# Altium PCB Panelized_S3220A.PcbDoc
Units mm, origin at the board's own origin, x right, y up, seen from the top; angles counter-clockwise.
Board outline 366 x 264 mm, 4 copper layers (Top Layer, Internal 1, Internal 2, Bottom Layer), stack 1.411 mm thick; 3 components, 135 nets, 10 pads, 0 vias.
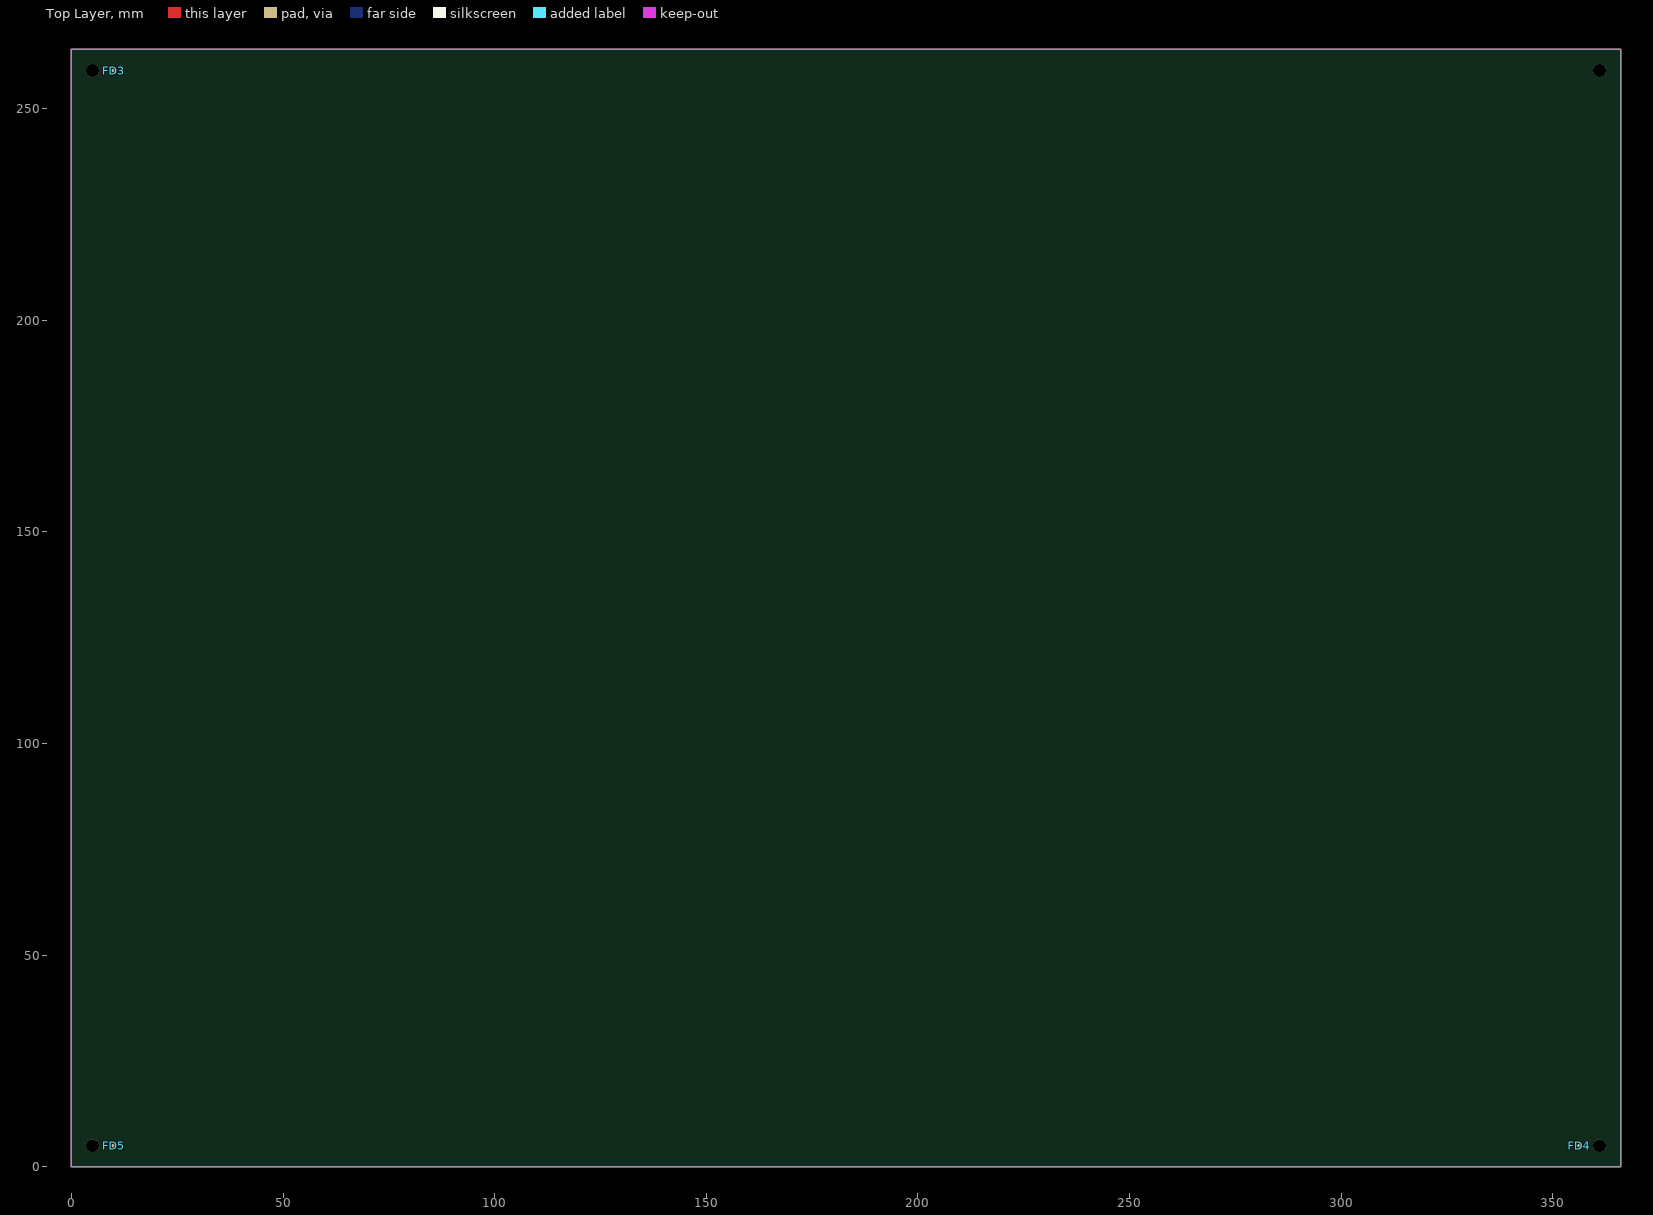
[diagram p0: Top Layer view]
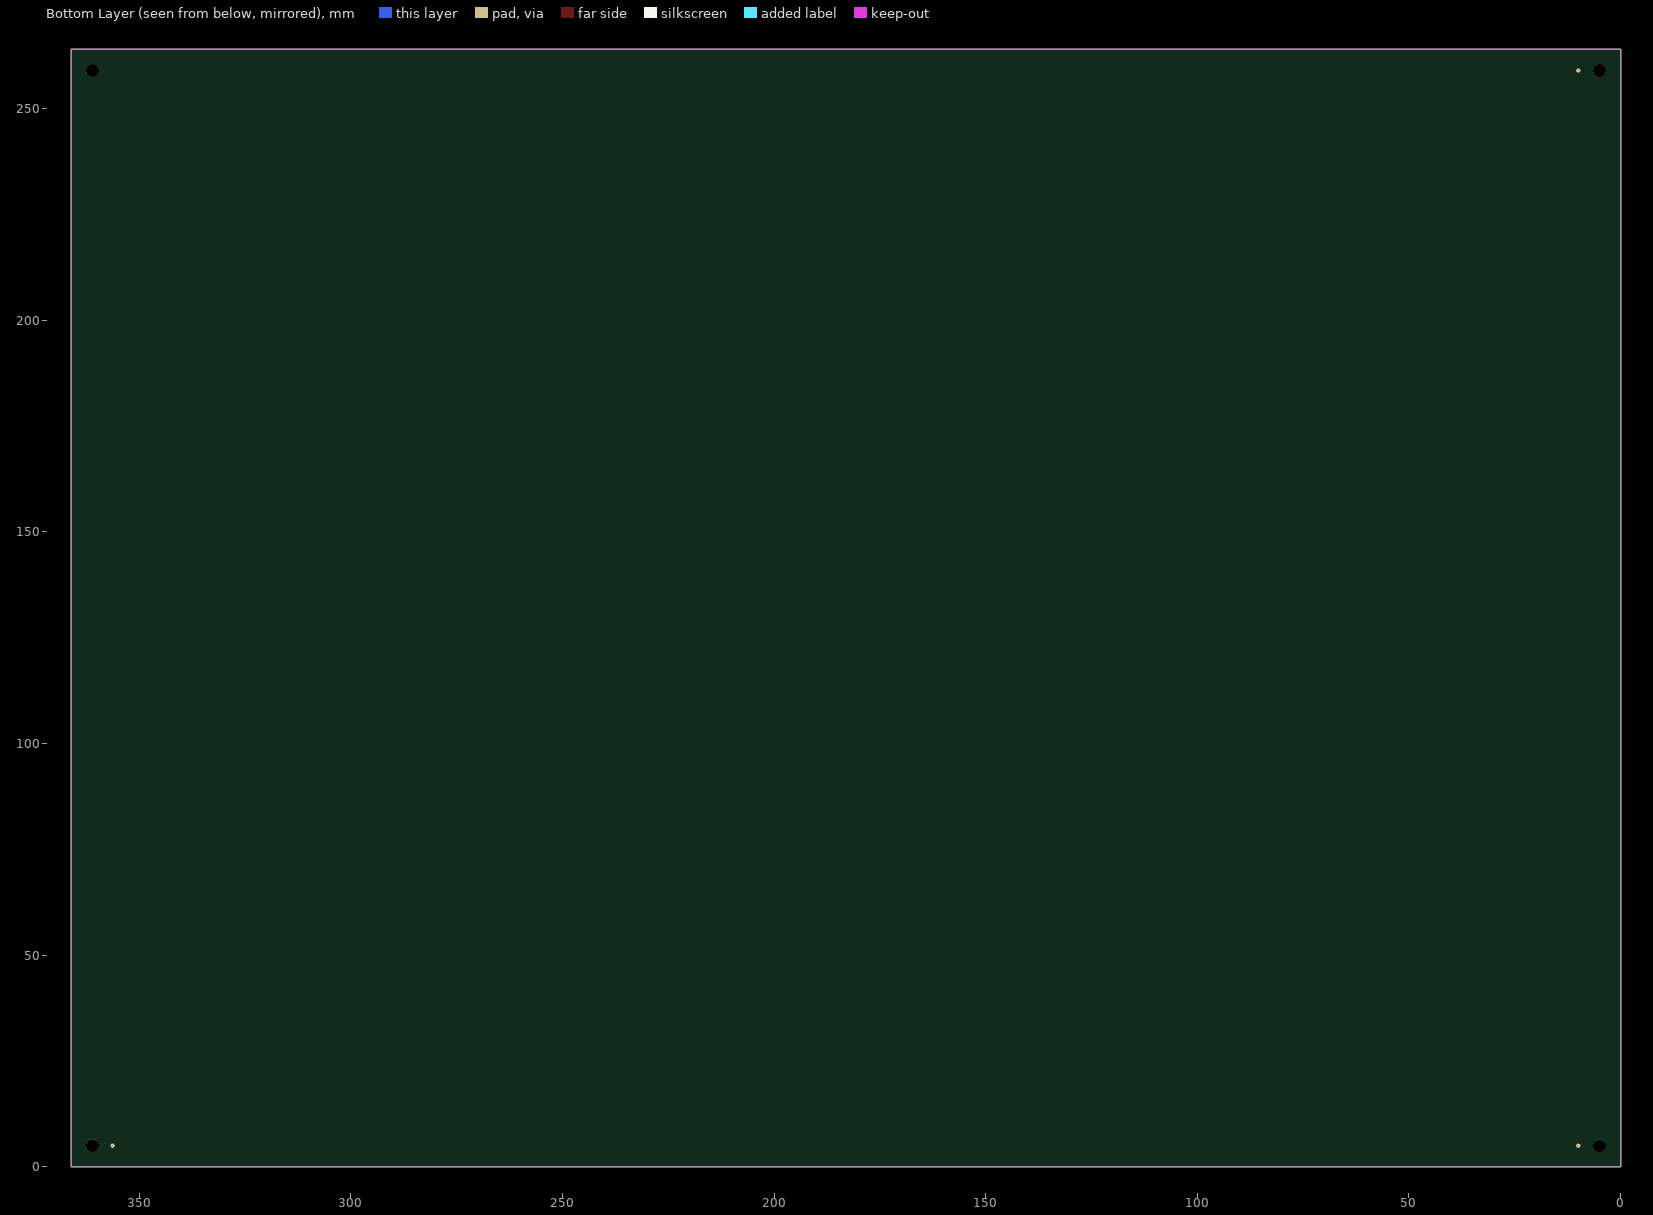
[diagram p1: Bottom Layer view, seen from below]

## Layer stack, top to bottom
Top Solder: solder mask 0.0102, Solder Resist, Dk 3.5
Top Layer: signal copper 0.035
Dielectric 1: core 0.12, FR-4, Dk 4.2
Internal 1: signal copper 0.035
Dielectric 3: prepreg 1.03, Dk 4.2
Internal 2: signal copper 0.035
Dielectric 2: core 0.12, Dk 4.2
Bottom Layer: signal copper 0.0356
Bottom Solder: solder mask 0.0102, Solder Resist, Dk 3.5

## Board outline
0,0 0,264 366,264 366,0

## Design rules (kind name [scope] priority, off if disabled: settings)
AssemblyTestPointUsage [All] p1 off:
AssemblyTestpoint [All] p1 off: testpointundercomponent=TRUE minsize=1.016 maxsize=2.54 preferedsize=1.524 minholesize=0 maxholesize=1.016 preferedholesize=0.813 testpointgrid=0.025 usegrid=TRUE gridtolerance=0 allowsidetop=TRUE allowsidebottom=TRUE
Clearance Clearance_TMP103 [HasFootprint('BGA4C40P2X2_76X76X62')] p1: gap=0.102 ignorepadtopadclearanceinfootprint=FALSE except(0: Arc-Hole Track-Hole SMDPad-Hole THPad-Hole Via-Hole Fill-Hole Poly-Hole Region-Hole Text-Hole)
Clearance Clearance_Poly [InPoly] p2: gap=0.25 ignorepadtopadclearanceinfootprint=FALSE except(0: Arc-Hole Track-Hole SMDPad-Hole THPad-Hole Via-Hole Fill-Hole Poly-Hole Region-Hole Text-Hole)
Clearance [All] p3: gap=0.15 ignorepadtopadclearanceinfootprint=FALSE except(0: Arc-Hole Track-Hole SMDPad-Hole THPad-Hole Via-Hole Fill-Hole Poly-Hole Region-Hole Text-Hole)
Clearance Clearance_Keepout [isKeepout] p4: gap=0.3 ignorepadtopadclearanceinfootprint=FALSE except(0: Arc-Hole Track-Hole SMDPad-Hole THPad-Hole Via-Hole Fill-Hole Poly-Hole Region-Hole Text-Hole)
ComponentClearance ComponentClearance_Fiducial [hasfootprint('fiducial_rect') or hasfootprint('fiducial_round')] p1 off: gap=0 collisioncheckmode=3 verticalgap=0 showdistances=FALSE
ComponentClearance [All] p2 off: gap=0.254 collisioncheckmode=3 verticalgap=0.254 showdistances=FALSE
DiffPairsRouting [All] p1: maxlimit=0.25 minlimit=0.25 mostfreqgap=0.25 toplayer_minwidth=0.2 toplayer_maxwidth=0.3 toplayer_prefwidth=0.2 midlayer1_minwidth=0.2 midlayer1_maxwidth=0.3 midlayer1_prefwidth=0.2 midlayer2_minwidth=0.2 midlayer2_maxwidth=0.3 midlayer2_prefwidth=0.2 bottomlayer_minwidth=0.2 bottomlayer_maxwidth=0.3 bottomlayer_prefwidth=0.2 maxuncoupledlength=12.7
FabricationTestPointUsage [All] p1 off: valid=0 allowmultiple=FALSE
FabricationTestpoint [All] p1 off: side=3 testpointundercomponent=TRUE minsize=1.016 maxsize=2.54 preferedsize=1.524 minholesize=0 maxholesize=1.016 preferedholesize=0.813 testpointgrid=0.025 allowsidetop=TRUE allowsidebottom=TRUE usegrid=TRUE gridtolerance=0
FanoutControl Fanout_BGA [IsBGA] p1: bgadir=Out bgaviamode=Centered fanoutstyle=BGA fanoutdirection=Alternating viagrid=0.025 // Fanout_BGA (Default Rule)
HoleSize [All] p1: absolutevalues=TRUE maxlimit=5.08 minlimit=0.203 maxpercent=80.000 minpercent=20.000
MatchedLengths "USB length matching" [InNetClass('All Nets')] p1: tolerance=2 checknetsindiffpair=TRUE checkdiffpairvsdiffpair=FALSE checkxsignals=FALSE checkothers=FALSE
MinimumSolderMaskSliver [All] p1: minsoldermaskwidth=0
PlaneClearance [All] p1: clearance=0.305
PlaneConnect PlaneConnect_Via [isvia] p1: planeconnectstyle=Direct reliefexpansion=0.508 reliefentries=4 reliefconductorwidth=0.254 reliefairgap=0.254
PlaneConnect [All] p2: planeconnectstyle=Relief reliefexpansion=0.254 reliefentries=4 reliefconductorwidth=0.508 reliefairgap=0.254
PolygonConnect PolygonConnect_SR [(ObjectKind = 'Component') And (Footprint = 'BGA81C80P3X3_290X230X110')] p1: connectstyle=Relief reliefconductorwidth=0.2 reliefentries=4 polygonreliefangle="90 Angle" airgapwidth=0.254
PolygonConnect PolygonConnect_TMP103 [HasFootprint('BGA4C40P2X2_76X76X62')] p2: connectstyle=Relief reliefconductorwidth=0.152 reliefentries=4 polygonreliefangle="90 Angle" airgapwidth=0.305
PolygonConnect PolygonConnect_Via [IsVia] p3: connectstyle=Direct reliefconductorwidth=0.254 reliefentries=4 polygonreliefangle="90 Angle" airgapwidth=0.254
PolygonConnect [All] p4: connectstyle=Relief reliefconductorwidth=0.2 reliefentries=4 polygonreliefangle="90 Angle" airgapwidth=0.305
RoutingLayers [All] p1: top layer_v5=TRUE mid layer 1_v5=FALSE mid layer 2_v5=FALSE bottom layer_v5=TRUE
RoutingVias [All] p1: holewidth=0.35 width=0.5 viastyle="Through Hole" minholewidth=0.25 minwidth=0.5 maxholewidth=0.5 maxwidth=1
SMDNeckDown [All] p1 off: percent=50.000
ShortCircuit ShortCircuit_Logo [hasfootprint('GT Logo Inv') or istextinverted] p1: allowed=TRUE
ShortCircuit [All] p2: allowed=FALSE
SilkToSilkClearance [All] p1 off: silktosilkclearance=0.254
SilkToSolderMaskClearance SilkscreenOverComponentPads [IsPad] p1 off: minsilkscreentomaskgap=0.254 clearancetoexposedcopper=TRUE
SolderMaskExpansion [All] p1 off: expansion=0.102 istentingtop=FALSE
Width Width_CASE [InNet('CASE')] p1: maxlimit=2.54 minlimit=0.203 preferedwidth=0.508
Width [All] p2: maxlimit=2.5 minlimit=0.15 preferedwidth=0.2
15 further rules are at their usual default settings.

## Classes and differential pairs
differential pair USB_Data: +USB_Data_P -USB_Data_N

## Components (designator, comment, footprint, x,y, rotation, side; value= is the part's Value field where it differs from the comment)
FD3 "Fiducial" FD_Fiducial 10,259 r90 top
FD4 "Fiducial" FD_Fiducial 356.25,5 r90 top (schematic designator FD3)
FD5 "Fiducial" FD_Fiducial 10,5 r90 top (schematic designator FD3)

## Footprints (in the part's own frame and the unit in brackets; to place one, negate y for a bottom-side part, rotate by r counter-clockwise, add the part's x,y. Pads: shape width x height; smd on the part's side, far side on the other; paste and mask are expansions set on the pad)
FD_Fiducial [mm] "Fiducial - reference point"
  round 1 smd paste-10 mask+0.5: 0(0,0)
  round 1 smd far side paste-10 mask+0.5: 0(0,0)
  Top Layer pour cut-out: 0,-1 -0.383,-0.924 -0.707,-0.707 -0.924,-0.383 -1,0 -1,0 -0.924,0.383 -0.707,0.707 -0.383,0.924 0,1 0,1 0.383,0.924 0.707,0.707 0.924,0.383 1,0 1,0 0.924,-0.383 0.707,-0.707 0.383,-0.924 0,-1
  Bottom Layer pour cut-out: 0,-1 -0.383,-0.924 -0.707,-0.707 -0.924,-0.383 -1,0 -1,0 -0.924,0.383 -0.707,0.707 -0.383,0.924 0,1 0,1 0.383,0.924 0.707,0.707 0.924,0.383 1,0 1,0 0.924,-0.383 0.707,-0.707 0.383,-0.924 0,-1

## Part data
FD3 FD4 FD5: "Reference point for assembly machine", Manufacturer="Swiss Innovation Lab", Currency=$, Manufacturer Part Number=Fiducial, Price=0, Supplier 1="Swiss Innovation Lab", Supplier Part Number 1=Fiducial

## Free pads (board coordinates)
  round 3 hole 3 unplated: ""(5,5) ""(5,259) ""(361,5) ""(361,259)

## Nets (pads, with @x,y where several pads share a name; then routed paths per layer and width w, separated by ;. In a path a pad name is that pad's centre, name@x,y a point inside that pad or via, vN(x,y) a via of type N, cw(c..) or ccw(c..) an arc to the next point about the centre after c; other vN are vias at no path point)
+3V: 
+3V_ext: 
+4V7: 
+5V: 
+VBat: 
ACC_INT: 
eLED_on_off: 
eLED_on_off_ext: 
ePaper_On_Off: 
ePaper_PSU: 
ePaper_RST: 
ePaper_VDD: 
ePaper_Wake_up: 
GND: 
GND_ext: 
GPS_On_Off: 
I2C_EXP_INT: 
LED_1: 
LED_1_switched: 
LED_2: 
LED_2_switched: 
LED_3: 
LED_3_switched: 
LED_4: 
LED_4_switched: 
LED_ACOK: 
LED_ACOK_ext: 
LED_CHGOK: 
LED_CHGOK_ext: 
Lora_On_Off: 
LORA_RESET: 
LoRa_VDD: 
Mic_ext: 
Mic_On_Off: 
Mic_On_Off_ext: 
Microphone: 
NetC5_1: 
NetC6_1: 
NetC6_2: 
NetC8_2: 
NetC11_1: 
NetC11_2: 
NetC12_2: 
NetC15_1: 
NetC17_2: 
NetC24_2: 
NetC28_2: 
NetC32_1: 
NetC33_1: 
NetC39_1: 
NetC40_1: 
NetC41_2: 
NetC42_2: 
NetC43_2: 
NetC44_1: 
NetC44_2: 
NetC45_2: 
NetD9_2: 
NetF2_1: 
NetJ10_1: 
NetJ10_2: 
NetJ10_3: 
NetJ14_1: 
NetL3_2: 
NetP7_S: 
NetQ2_3: 
NetQ3_3: 
NetQ5_3: 
NetQ6_3: 
NetQ10_3: 
NetR1_2: 
NetR2_2: 
NetR3_2: 
NetR6_2: 
NetR8_1: 
NetR9_1: 
NetR10_1: 
NetR10_2: 
NetR14_2: 
NetR15_1: 
NetR16_1: 
NetR18_1: 
NetR19_1: 
NetR19_2: 
NetR21_2: 
NetR38_2: 
NetR49_1: 
NetR49_2: 
NetU5_1: 
NetU7_13: 
NetU8_16: 
NetU19_1: 
NetU19_2: 
NetU19_3: 
NTC: 
PB_1: 
PB_1_ext: 
PB_2: 
PB_2_ext: 
PB_3: 
PB_3_ext: 
PB_4: 
PB_4_ext: 
RESET#: 
RX_ePaper: 
S\D\: 
SCL: 
SCL_ext: 
SDA: 
SDA_ext: 
SWDCLK: 
SWDIO: 
SWO: 
TX_ePaper: 
UART_CTS: 
UART_RTS: 
UART_RX_ePaper: 
UART_RX_GPS: 
UART_RX_Lora: 
UART_RX_USB: 
UART_RX_WiFi: 
UART_TX_ePaper: 
UART_TX_GPS: 
UART_TX_Lora: 
UART_TX_USB: 
UART_TX_WiFi: 
USB_Data_N: 
USB_Data_P: 
VBat: 
Vcc: 
Vcc_ext: 
Vext: 
VSys: 
Vusb: 
WiFi_ON_OFF: 
pads on no net: FD3.0 FD4.0 FD5.0

## Keep-outs
Keep-Out Layer:
  the board outline again, w0.3

## Silkscreen, mask and mechanical layers (free items; w line width, h text height)
Fabrication notes:
  drawing of 702 lines, arcs and shapes, not listed
  text "DESIGN INFORMATION" at 396.102,259.543 h2
  text "BOARD NAME:" at 433.694,259.543 h2
  text "Panelized S3220A" at 446.5,259.5 h2
  text "BOARD TECHNOLOGY" at 396.102,257.003 h2
  text "0.2mm" at 398.223,254.814 h2
  text "PANEL SIZE:" at 448.5,254.75 h2
  text "366.00 mm" at 463,254.75 h2
  text "264.00 mm" at 486,254.75 h2
  text "0.2mm" at 411.901,254.641 h2
  text "0.2mm" at 425.871,254.514 h2
  text "X" at 478.781,253.955 h2
  text "(MIN. TRACK   /      PADS          /    CLEARANCE)" at 396,251.75 h2
  text "SINGLE BOARD SIZE:" at 441,250.75 h2
  text "166.00 mm" at 463,250.75 h2
  text "115.00 mm" at 486,250.75 h2
  text "X" at 478.781,250.205 h2
  text "MINIMUM HOLE SIZE: 0.35mm" at 396.25,248.5 h2
  text "CIRCUIT TYPE:" at 396.102,244.481 h2
  text "SS" at 418.962,244.481 h2
  text "DS" at 436.742,244.481 h2
  text "X" at 451.347,244.481 h2
  text "PTH" at 454.522,244.481 h2
  text "ML" at 465.444,244.481 h2
  text "X" at 469.254,244.481 h2
  text "No. of Layers" at 472.302,244.481 h2
  text "4" at 489.663,244.324 h2
  text "FINGER CONNECTOR DIM PER:" at 396.102,241.433 h2
  text "AS SHOWN" at 472.302,241.433 h2
  text "No. OFF TOTAL" at 412.866,238.639 h2
  text "ONE SIDE" at 454.522,238.639 h2
  text "BOTH SIDES" at 472.302,238.385 h2
  text "X" at 433.664,235.818 h2
  text "VIAS:" at 396.102,235.718 h2
  text "NONE" at 407.532,235.718 h2
  text "X" at 415.914,235.718 h2
  text "FEED THRU'" at 418.962,235.718 h2
  text "TENTED" at 436.742,235.718 h2
  text "BURIED LAYER SEQUENCE" at 454.522,235.718 h2
  text "UNIQUE DRILL" at 418.962,232.67 h2
  text "2 SIZE" at 436.742,232.67 h2
  text "BLIND LAYER SEQUENCE" at 454.522,232.67 h2
  text "Layer Stack Manager (PCB)" at 431.535,230.384 h2
  text "X" at 469.254,230.384 h2
  text "AS SHOWN" at 472.302,230.384 h2
  text "LAYER CONSTRUCTION PER:" at 396.102,230.257 h2
  text "Altium Designer 20" at 472.141,227.597 h2
  text "ARTWORK:" at 396.102,227.463 h2
  text "MANUAL" at 418.962,227.463 h2
  text "DIGITISED" at 436.742,227.463 h2
  text "X" at 451.474,227.463 h2
  text "CAD" at 454.522,227.463 h2
  text "TYPE" at 465.444,227.463 h2
  text "ARTWORK/PATTERN MASTER LIST" at 396.102,222.764 h2
  text "DESCRIPTION" at 397.372,220.351 h2
  text "DRAWING No./CAD FILE REF." at 416.041,220.351 h2
  text "LAYER NAME" at 457.316,220.351 h2
  text "GERBER FILE REF" at 478.068,220.275 h2
  text "Top Paste Mask" at 455.259,215.271 h2
  text "GTP" at 448.182,215.221 h2
  text "GTP" at 498.062,215.195 h2
  text "GERBER FILE" at 395.757,215.144 h2
  text "GTO" at 448.182,212.721 h2
  text "GTO" at 498.062,212.706 h2
  text "Top Overlay" at 455.259,212.68 h2
  text "GERBER FILE" at 395.757,212.604 h2
  text "Top Solder Mask" at 455.259,210.242 h2
  text "GTS" at 448.182,210.221 h2
  text "GTS" at 498.062,210.115 h2
  text "GERBER FILE" at 395.757,210.064 h2
  text "TOP LAYER" at 455.259,207.651 h2
  text "GTL" at 498.062,207.575 h2
  text "GERBER FILE" at 395.757,207.524 h2
  text "GTL" at 448.182,207.521 h2
  text "G1" at 498.062,205.192 h2
  text "Signal Layer 1" at 455.259,205.092 h2
  text "GERBER FILE" at 395.757,204.984 h2
  text "G1" at 448.182,205.001 h2
  text "Signal Layer 2" at 455.26,202.592 h2
  text "G2" at 498.062,202.592 h2
  text "G2" at 448.182,202.501 h2
  text "GERBER FILE" at 395.757,202.444 h2
  text "BOTTOM LAYER" at 455.259,200.031 h2
  text "GBL" at 448.182,199.957 h2
  text "GBL" at 498.062,199.955 h2
  text "GERBER FILE" at 395.757,199.904 h2
  text "GBS" at 448.182,197.557 h2
  text "Bottom Solder Mask" at 455.259,197.542 h2
  text "GBS" at 498.062,197.415 h2
  text "GERBER FILE" at 395.757,197.364 h2
  text "GBO" at 448.182,194.957 h2
  text "Bottom Overlay" at 455.259,194.951 h2
  text "GBO" at 498.062,194.875 h2
  text "GERBER FILE" at 395.757,194.824 h2
  text "GBP" at 498.062,192.462 h2
  text "Bottom Paste Mask" at 455.259,192.411 h2
  text "GBP" at 448.182,192.361 h2
  text "GERBER FILE" at 395.757,192.284 h2
  text "GM3" at 498.062,187.362 h2
  text "V-groove scoring" at 455.259,187.311 h2
  text "GM3" at 448.182,187.261 h2
  text "GERBER FILE" at 395.757,187.184 h2
  text "GM4" at 498.062,184.862 h2
  text "Route Cutter Tool Layer" at 455.259,184.811 h2
  text "GM4" at 448.182,184.761 h2
  text "GERBER FILE" at 395.757,184.684 h2
  text "APERTURE LIST" at 395.757,172.097 h2
  text "APR" at 448.182,172.021 h2
  text "DRILL REPORT" at 395.757,169.557 h2
  text "DRR" at 448.182,169.481 h2
  text "DRILL FILE" at 395.757,166.95 h2
  text "DRL" at 448.182,166.806 h2
  text "TXT" at 448.182,164.4 h2
  text "EXCELLON DRILL" at 395.757,164.325 h2
  text "MATERIAL:" at 396.102,159.12 h2
  text "GLASS FIBRE EPOXY RESIN NEMA GRADE FR4-08 (IPC-4101) - WITH TG170" at 421.756,158.866 h2
  text "X" at 419.089,158.739 h2
  text "THICKNESS:" at 403.976,155.945 h2
  text "0.8mm" at 421.756,155.945 h2
  text "1.2mm" at 439.409,155.945 h2
  text "1.6mm" at 457.062,155.945 h2
  text "2.4mm" at 474.842,155.945 h2
  text "3.2mm" at 492.622,155.945 h2
  text "X" at 454.649,155.818 h2
  text "TOLERANCE:" at 403.849,152.897 h2
  text "OTHER +/-" at 474.842,152.897 h2
  text "IN A/W IPC-D-300G CLASS" at 422.302,152.697 h2
  text "BOW & TWIST:" at 403.836,149.849 h2
  text "AS SHOWN" at 474.969,149.722 h2
  text "IN A/W IPC-D-300G CLASS" at 422.302,149.649 h2
  text "COPPER THICKNESS (FINISHED)" at 401.4,146.85 h2
  text "18um" at 421.756,144.261 h2
  text "35um" at 448.807,144.261 h2
  text "70um" at 475.096,144.261 h2
  text "OUTER:" at 405,144.15 h2
  text "X" at 446.064,144.058 h2
  text "18um" at 421.756,141.213 h2
  text "35um" at 448.807,141.213 h2
  text "70um" at 475.096,141.213 h2
  text "INNER SIGNAL:" at 405,141.15 h2
  text "X" at 446.013,141.01 h2
  text "18um" at 421.756,138.165 h2
  text "35um" at 448.807,138.165 h2
  text "70um" at 475.096,138.165 h2
  text "INNER PWR:" at 405,138.15 h2
  text "X" at 446.14,138.038 h2
  text "STRUCTURE:" at 396.102,135.117 h2
  text "REFER" at 421.756,135.117 h2
  text "AS PER DRAWING No." at 421.629,131.942 h2
  text "AS SHOWN" at 474.969,131.942 h2
  text "X" at 472.429,131.815 h2
  text "DRILLING:" at 396.102,129.148 h2
  text "COMPONENT SIDE" at 421.756,126.862 h2
  text "SOLDER SIDE" at 448.553,126.862 h2
  text "VIEWED FROM:" at 403.1,126.65 h2
  text "X" at 419.089,126.608 h2
  text "REFERENCE:" at 403.341,123.814 h2
  text "AS SHOWN" at 421.629,123.687 h2
  text "PATTERN MASTER LIST" at 448.68,123.687 h2
  text "X" at 472.429,123.687 h2
  text "NC_DRILL FILES" at 474.969,123.687 h2
  text "X" at 419.089,123.56 h2
  text "20um" at 448.807,120.766 h2
  text "PTH MINIMUM COPPER THICKNESS:" at 403.4,120.65 h2
  text "X" at 446.14,120.639 h2
  text "OTHER" at 474.969,120.639 h2
  text "NPTH:" at 403.3,117.75 h2
  text "TENTED" at 421.629,117.591 h2
  text "X" at 446.14,117.591 h2
  text "PADS REMOVED" at 448.68,117.591 h2
  text "REMOVE PADS" at 474.969,117.591 h2
  text "X" at 419.089,117.464 h2
  text "2nd DRILL" at 421.629,114.543 h2
  text "BOTH" at 448.68,114.543 h2
  text "AS SHOWN" at 460.999,114.543 h2
  text "NONE" at 474.969,114.543 h2
  text "BOARD FINISH:" at 396.102,111.622 h2
  text "X" at 419.089,111.495 h2
  text "ETCHING" at 421.629,111.495 h2
  text "REFER PATTERN MASTER LIST" at 448.68,111.495 h2
  text "LEGEND / SCREEN PRINT:" at 402.5,108.55 h2
  text "NONE" at 430.102,108.558 h2
  text "COMPONENT" at 448.677,108.523 h2
  text "SOLDER" at 475.002,108.458 h2
  text "X" at 446.137,108.396 h2
  text "X" at 472.387,108.396 h2
  text "WHITE" at 421.702,105.658 h2
  text "COLOUR:" at 408.4,105.55 h2
  text "X" at 419.162,105.531 h2
  text "YELLOW" at 448.68,105.399 h2
  text "OTHER" at 474.969,105.399 h2
  text "SOLDER RESIST:" at 402.3,102.35 h2
  text "LIQUID PHOTOIMAGEABLE" at 421.629,102.351 h2
  text "SCREEN PRINT" at 460.999,102.351 h2
  text "FINISH:" at 408.7,99.35 h2
  text "MATTE" at 421.629,99.303 h2
  text "GLOSS" at 434.329,99.303 h2
  text "COLOUR:" at 408.4,96.35 h2
  text "RED" at 421.629,96.255 h2
  text "X" at 431.75,96.25 h2
  text "GREEN" at 434.329,96.255 h2
  text "YELLOW" at 448.68,96.255 h2
  text "BLUE" at 460.999,96.255 h2
  text "OTHER" at 474.969,96.255 h2
  text "TRACK FINISH:" at 396.102,93.334 h2
  text "SELECTIVE SOLDER (HASL)" at 421.629,93.207 h2
  text "REFLOW SOLDER" at 460.999,93.207 h2
  text "0.1um - 0.2um ELECTROLESS GOLD OVER 3um NICKEL" at 421.7,90.35 h2
  text "X" at 419.1,90.25 h2
  text "IMMERSION GOLD" at 421.629,87.111 h2
  text "OTHER" at 460.999,87.111 h2
  text "EDGE BOARD" at 396.102,84.19 h2
  text "1.3um HARD GOLD OVER 5um     NICKEL / TIN-NICKEL" at 421.629,84.063 h2
  text "CONTACTS:" at 396.102,82.031 h2
  text "HARD FINISH GOLDE PLATE" at 421.629,81.015 h2
  text "OTHER" at 460.999,81.015 h2
  text "AS SHOWN" at 421.629,77.967 h2
  text "REFER" at 460.999,77.967 h2
  text "PROFILING:" at 396.102,74.919 h2
  text "AS DIMENSIONED, MEASURED AND CUT FROM SPECIFIED DATUM." at 421.629,74.919 h2
  text "X" at 419.089,74.792 h2
  text "REFER PCB BLANK DWG No." at 421.756,71.998 h2
  text "USE PROFILE / ROUTE TAPE SUPPLIED (REFER PATTERN MASTER LIST)" at 421.756,68.95 h2
  text "SQUARE CUT" at 421.756,65.902 h2
  text "N.C. ROUTE" at 439.536,65.902 h2
  text "V. SCORE" at 457.316,65.902 h2
  text "BLANK" at 475.096,65.902 h2
  text "X" at 436.75,65.75 h2
  text "X" at 454.5,65.75 h2
  text "ACCEPTABILITY:" at 396.102,63.235 h2
  text "MATERIALS AND WORKMANSHIP FOR ALL PRINTED WIRING BOARDS TO MEET" at 418.327,63.108 h2
  text "OR EXCEED THE REQUIREMENTS OF:" at 418.327,60.314 h2
  text "IPC-6011/12 AND IPC-A-600E" at 421.883,57.647 h2
  text "1" at 457.443,57.647 h2
  text "2" at 466.333,57.647 h2
  text "3" at 475.229,57.585 h2
  text "UL CERTIFICATION" at 421.883,54.599 h2
  text "AUSTEL" at 457.443,54.599 h2
  text "ML-P-55110F GRP" at 421.375,51.551 h2
  text "A" at 441.163,51.551 h2
  text "B" at 449.303,51.551 h2
  text "AS2546" at 457.443,51.551 h2
  text "OTHER" at 475.223,51.551 h2
  text "ADDITIONAL REQUIREMENTS:" at 395.9,48.25 h2
  text "X" at 419.15,45.657 h2
  text "NONE" at 421.849,45.672 h2
  text "SAMPLE PLAN" at 439.629,45.672 h2
  text "MIL-P-55110E SERIAL Nos. PER ORDER" at 459.409,45.672 h2
  text "MICROSECTION:" at 401.1,45.55 h2
  text "NONE" at 421.944,42.484 h2
  text "CERTIFICATION:" at 401,42.35 h2
  text "A" at 459.363,42.251 h2
  text "MIL-P-55110E GRP" at 439.519,42.201 h2
  text "B" at 464.729,42.172 h2
  text "1" at 489.429,42.072 h2
  text "2" at 494.795,41.993 h2
  text "3" at 500.295,41.993 h2
  text "IPC CLASS:" at 475.019,41.901 h2
  text "RoHS Compliant" at 421.944,39.284 h2
  text "QUALITY RELEASE REPORT" at 439.519,39.001 h2
  text "OTHER" at 475.123,38.951 h2
  text "NONE" at 421.889,36.072 h2
  text "REQUIRED (100% PADS & NETS)" at 439.669,36.072 h2
  text "ELECTRICAL TEST:" at 401,35.95 h2
  text "PER ORDER" at 475.329,35.972 h2
  text "X" at 437.002,35.945 h2
  text "2 SIDES" at 459.045,32.885 h2
  text "MIN. PITCH" at 475.129,32.885 h2
  text "0.6mm" at 488.718,32.885 h2
  text "NONE" at 421.889,32.872 h2
  text "1 SIDE" at 439.542,32.872 h2
  text "SURFACE MOUNT:" at 400.9,32.75 h2
  text "X" at 456.75,32.75 h2
  text "FOIL" at 459.449,29.732 h2
  text "NONE" at 439.669,29.632 h2
  text "LEGEND" at 468.179,29.632 h2
  text "REFER" at 480.182,29.632 h2
  text "Bottom Overlay" at 488.306,29.646 h2
  text "X" at 477.488,29.593 h2
  text "MANUFACTURER'S ID/LOGO:" at 400.9,29.35 h2
  text "NONE" at 459.5,26.55 h2
  text "ISO9001/AS3901" at 439.689,26.372 h2
  text "MANUFACTURER'S ACCREDITATION:" at 400.9,26.25 h2
  text "PACKAGING AND HANDLING:" at 400.9,23.45 h2
  text "REFER" at 459.449,23.236 h2
  text "PER ORDER" at 439.669,23.136 h2
  text "Notes" at 394.3,15.7 h5
  text "1. All dimensions are in mm." at 395.97,9.87 h4
  text "2. The route cutter tool diameter is 2.0mm." at 395.97,5.62 h4
  text "3. The V-groove scoring tool angle is 30 degrees." at 395.97,1.12 h4
Mechanical 3:
  lines w0.2: -10,11.75 376,11.75 ; -10,127.25 376,127.25 ; -10,136.75 376,136.75 ; -10,252.25 376,252.25 ; 11.75,-10 11.75,274 ; 187.75,-10 187.75,274

## Panel: embedded boards
"S3220A.PcbDoc" at 12,12, 2 rows x 2 columns, spacing 125 x 176, rotation 0